# EAGLE board arm7-oscilloscope (EAGLE 4.16), part 1 of 2
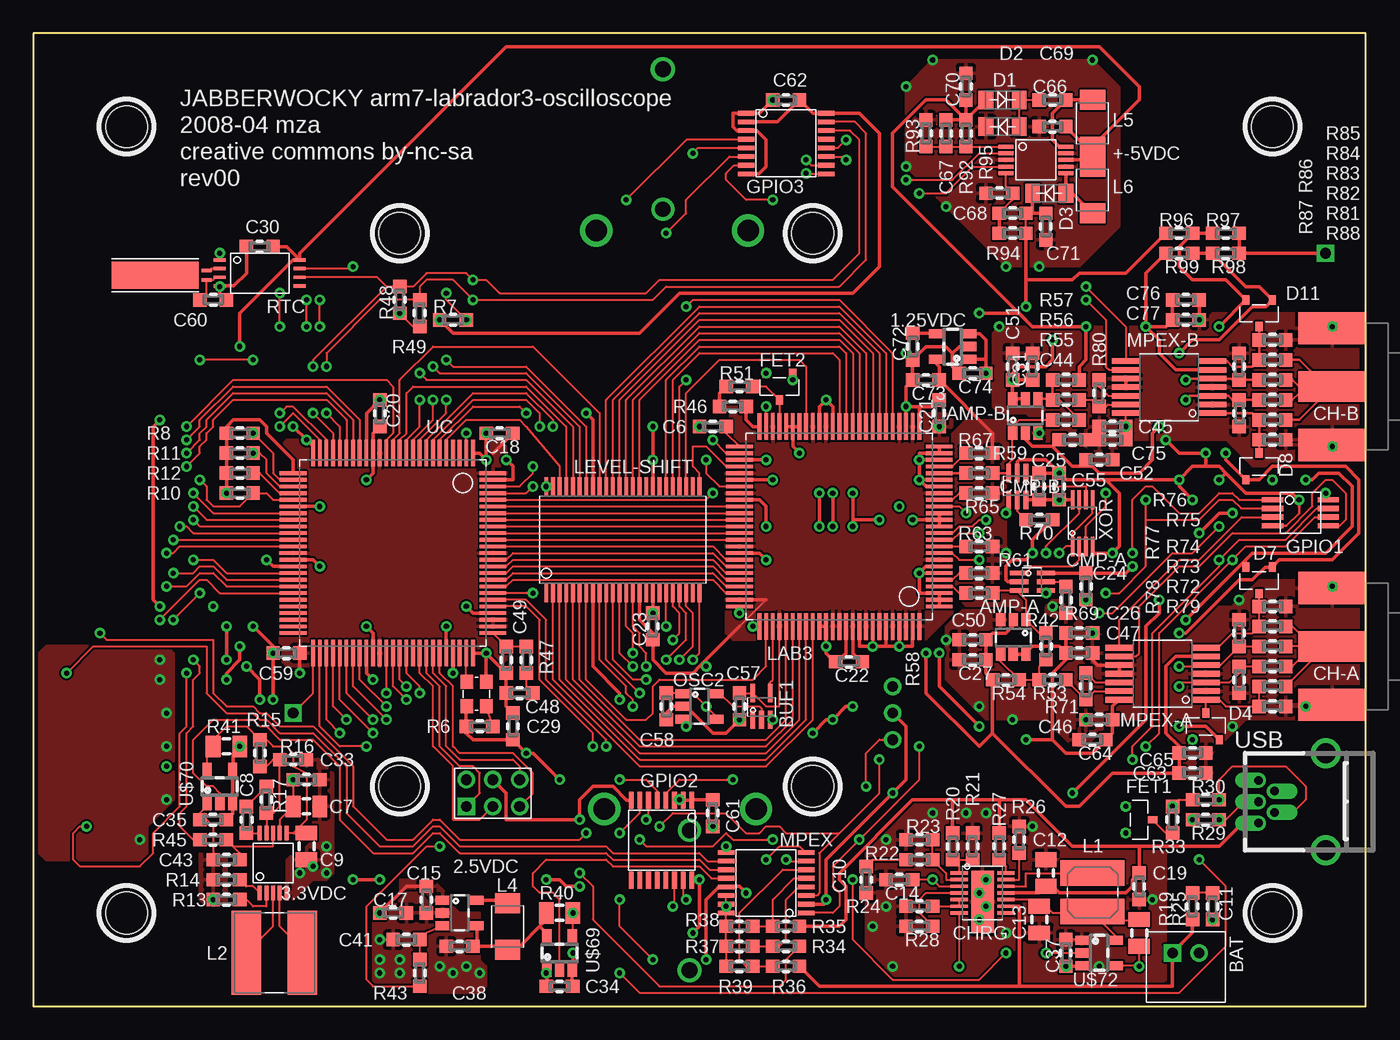
[diagram p0: board, top side]
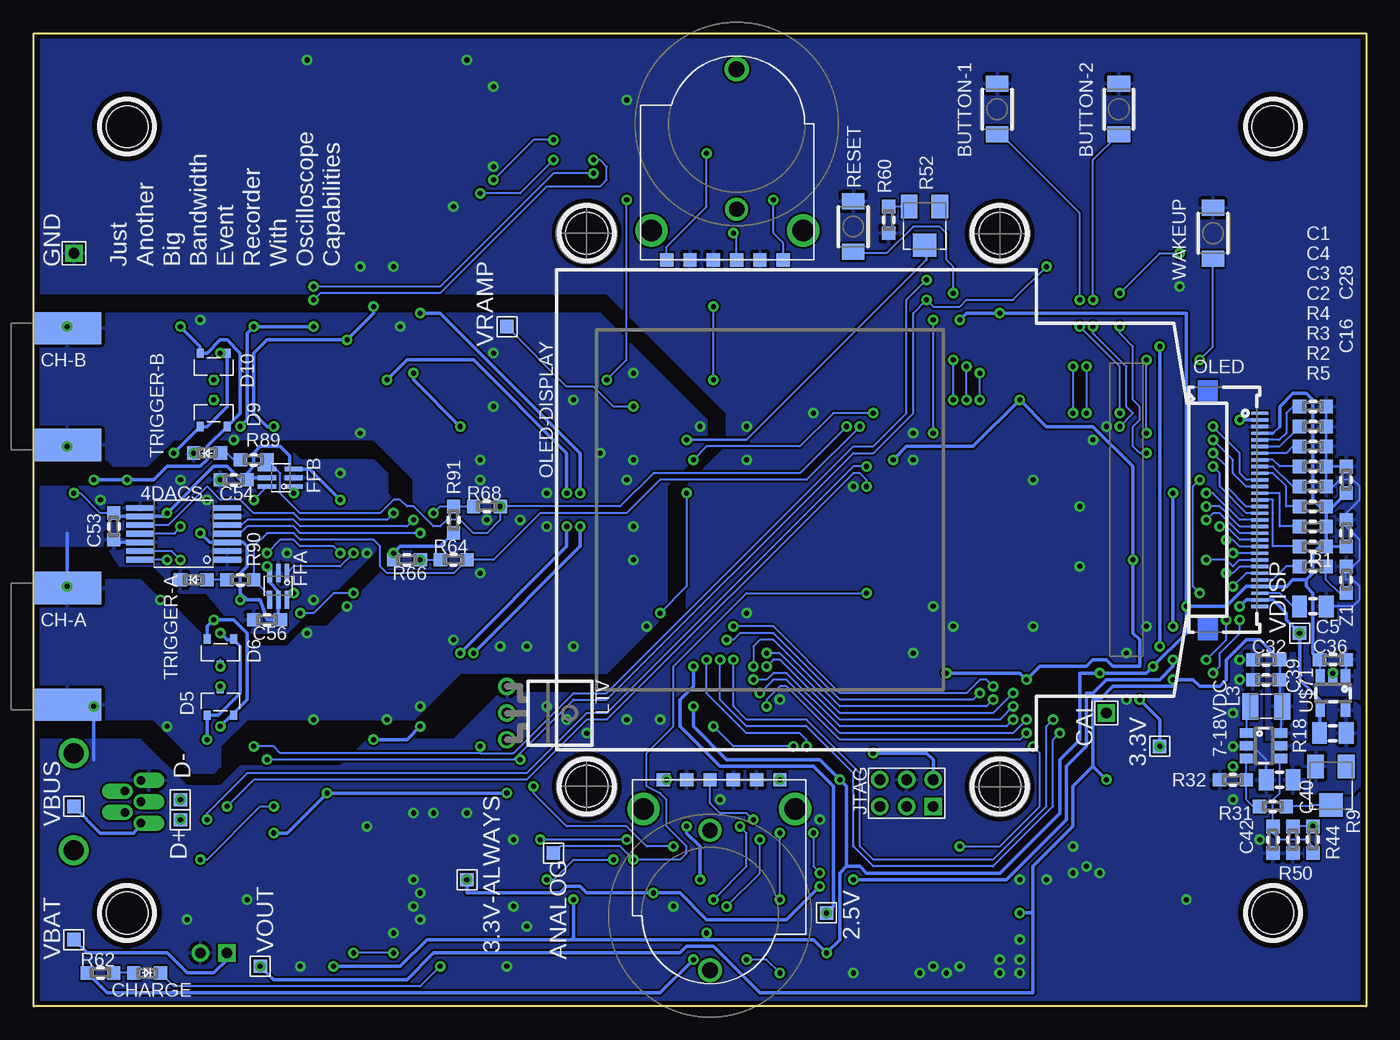
[diagram p1: board, bottom side, seen from below]

Size 100 x 73 mm. Coordinates in mm from the lower left corner, seen from the top.
Outline: 0,0 100,0 100,73 0,73 0,0
Copper layers (1*16): Top 0.035mm / dielectric 1.5mm / Bottom 0.035mm
Design rules "default": minimum track width 6mil, minimum drill 15mil, track to track 6mil, track to pad 6mil, pad to pad 6mil, via to via 6mil, smd to smd 0mil, copper to edge 0mil, drill to drill 8mil, minimum pad ring 10mil, minimum via ring 8mil, stop-mask expansion 4mil, vias tented up to drill 0mil, thermal gap 10mil

## Footprints (pad centres in the part's own frame; a part is rotated, then mirrored left to right if it is on the bottom)
SOT-23-5 = smd 0.69 x 0.99: 1 -0.953,-1.295; 2 0,-1.295; 3 0.953,-1.295; 4 0.953,1.291; 5 -0.953,1.291
TEST-POINT-SURFACE-MOUNT-1X1 = smd 1 x 1: 1 0,0
MSOP-10 = smd 0.295 x 1.1: 1 0,0; 2 0.5,0; 3 1,0; 4 1.5,0; 5 2,0; 6 2,4.5; 7 1.5,4.5; 8 1,4.5; 9 0.5,4.5; 10 0,4.5
TSSOP-14 = smd 0.42 x 2.1: 01 0,0; 02 0.65,0; 03 1.3,0; 04 1.95,0; 05 2.6,0; 06 3.25,0; 07 3.9,0; 08 3.9,6.5; 09 3.25,6.5; 10 2.6,6.5; 11 1.95,6.5; 12 1.3,6.5; 13 0.65,6.5; 14 0,6.5
SOT-23-6 = smd 0.69 x 0.99: 1 -0.003,0.006; 2 0.95,0.006; 3 1.903,0.006; 4 1.903,2.592; 5 0.953,2.592; 6 -0.003,2.592
S2B-PH-K = drill 0.8 square: 1 2,0 | drill 0.8 round: 2 0,0
SC-70-5 = smd 0.35 x 1.38: 1 0,0; 2 0.65,0; 3 1.3,0; 4 1.3,2; 5 0,2
B3U-1000P = smd 1.2 x 1.7: 1 -1.9,0; 2 1.9,0
0603 = smd 1 x 1: 1 2,0; 2 0,0
0805 = smd 1.1 x 1.6: 1 0,0; 2 2,0
TEST-POINT-THROUGH-HOLE = drill 0.8 square: 1 0,0
SMA-SHORT-BARREL-SD-73251-115 = smd 5.08 x 2.415: GND@1 0,-4.383; GND@2 0,4.383 | smd 5.08 x 2.415 bottom: GND@3 0,4.383; GND@4 0,-4.383 | smd 5.08 x 2.29: SIGNAL 0,0
0603' = smd 1 x 1: A 2,0; C 0,0
DFN-14 = smd 0.25 x 1.3: 01 0,0; 02 0.5,0; 03 1,0; 04 1.5,0; 05 2,0; 06 2.5,0; 07 3,0; 08 3,3.5; 09 2.5,3.5; 10 2,3.5; 11 1.5,3.5; 12 1,3.5; 13 0.5,3.5; 14 0,3.5 | smd 4.65 x 1.7: BOTTOM-PAD 2.15,1.75
SC-70-6 = smd 0.35 x 1.38: 1 0,0; 2 0.65,0; 3 1.3,0; 4 1.3,2; 5 0.65,2; 6 0,2
1005-DIODE-SCHOTTKY = smd 1.1 x 1.4: P$1 0,0; P$2 2.5,0
SOT-23 = smd 0.53 x 0.7: 04 2,0; 08 0,0; 12 1,2
MSOP-8-OR-TSSOP-8 = smd 0.4 x 1.6: 1 0,0; 2 0.65,0; 3 1.3,0; 4 1.95,0; 5 1.95,4.2; 6 1.3,4.2; 7 0.65,4.2; 8 0,4.2
TSSOP-16 = smd 0.35 x 1.25: 01 0,0; 02 0.65,0; 03 1.3,0; 04 1.95,0; 05 2.6,0; 06 3.25,0; 07 3.9,0; 08 4.55,0; 09 4.55,6; 10 3.9,6; 11 3.25,6; 12 2.6,6; 13 1.95,6; 14 1.3,6; 15 0.65,6; 16 0,6
HEADER-2MM-2X3 = drill 0.8 square: 1 0,0 | drill 0.8 round: 2 2,0; 3 4,0; 4 4,2; 5 2,2; 6 0,2
ELL4-M = smd 1.9 x 4.8: 1 0,0; 2 2.9,0
SD6030 = smd 6.3 x 2.2: 1 0,0; 2 0,4.2
1007 = smd 1.2 x 2: 1 -0.2,0; 2 2.2,0
1210 = smd 1.5 x 1.9: 1 0,0; 2 3.5,0
LQFP-100 = smd 0.28 x 2: 001 0,0; 002 0.5,0; 003 1,0; 004 1.5,0; 005 2,0; 006 2.5,0; 007 3,0; 008 3.5,0; 009 4,0; 010 4.5,0; 011 5,0; 012 5.5,0; 013 6,0; 014 6.5,0; 015 7,0; 016 7.5,0; 017 8,0; 018 8.5,0; 019 9,0; 020 9.5,0; 021 10,0; 022 10.5,0; 023 11,0; 024 11.5,0; 025 12,0; 051 12,15; 052 11.5,15; 053 11,15; 054 10.5,15; 055 10,15; 056 9.5,15; 057 9,15; 058 8.5,15; 059 8,15; 060 7.5,15; 061 7,15; 062 6.5,15; 063 6,15; 064 5.5,15; 065 5,15; 066 4.5,15; 067 4,15; 068 3.5,15; 069 3,15; 070 2.5,15; 071 2,15; 072 1.5,15; 073 1,15; 074 0.5,15; 075 0,15 | smd 2 x 0.28: 026 13.5,1.5; 027 13.5,2; 028 13.5,2.5; 029 13.5,3; 030 13.5,3.5; 031 13.5,4; 032 13.5,4.5; 033 13.5,5; 034 13.5,5.5; 035 13.5,6; 036 13.5,6.5; 037 13.5,7; 038 13.5,7.5; 039 13.5,8; 040 13.5,8.5; 041 13.5,9; 042 13.5,9.5; 043 13.5,10; 044 13.5,10.5; 045 13.5,11; 046 13.5,11.5; 047 13.5,12; 048 13.5,12.5; 049 13.5,13; 050 13.5,13.5; 076 -1.5,13.5; 077 -1.5,13; 078 -1.5,12.5; 079 -1.5,12; 080 -1.5,11.5; 081 -1.5,11; 082 -1.5,10.5; 083 -1.5,10; 084 -1.5,9.5; 085 -1.5,9; 086 -1.5,8.5; 087 -1.5,8; 088 -1.5,7.5; 089 -1.5,7; 090 -1.5,6.5; 091 -1.5,6; 092 -1.5,5.5; 093 -1.5,5; 094 -1.5,4.5; 095 -1.5,4; 096 -1.5,3.5; 097 -1.5,3; 098 -1.5,2.5; 099 -1.5,2; 100 -1.5,1.5
TSSOP-48 = smd 0.285 x 1.35: 01 0,0; 02 0.5,0; 03 1,0; 04 1.5,0; 05 2,0; 06 2.5,0; 07 3,0; 08 3.5,0; 09 4,0; 10 4.5,0; 11 5,0; 12 5.5,0; 13 6,0; 14 6.5,0; 15 7,0; 16 7.5,0; 17 8,0; 18 8.5,0; 19 9,0; 20 9.5,0; 21 10,0; 22 10.5,0; 23 11,0; 24 11.5,0; 25 11.5,8; 26 11,8; 27 10.5,8; 28 10,8; 29 9.5,8; 30 9,8; 31 8.5,8; 32 8,8; 33 7.5,8; 34 7,8; 35 6.5,8; 36 6,8; 37 5.5,8; 38 5,8; 39 4.5,8; 40 4,8; 41 3.5,8; 42 3,8; 43 2.5,8; 44 2,8; 45 1.5,8; 46 1,8; 47 0.5,8; 48 0,8
TSL250-BENT = drill 0.8 round: 1 -2,0; 2 0,0; 3 2,0
XF2M-3015-1A-TOP-CONTACTS-IN-USE = smd 0.25 x 1.3: 1 0.005,0.018; 2 0.505,0.018; 3 1.005,0.018; 4 1.505,0.018; 5 2.005,0.018; 6 2.505,0.018; 7 3.005,0.018; 8 3.505,0.018; 9 4.005,0.018; 10 4.505,0.018; 11 5.005,0.018; 12 5.505,0.018; 13 6.005,0.018; 14 6.505,0.018; 15 7.005,0.018; 16 7.505,0.018; 17 8.005,0.018; 18 8.505,0.018; 19 9.005,0.018; 20 9.505,0.018; 21 10.005,0.018; 22 10.505,0.018; 23 11.005,0.018; 24 11.505,0.018; 25 12.005,0.018; 26 12.505,0.018; 27 13.005,0.018; 28 13.505,0.018; 29 14.005,0.018; 30 14.505,0.018
OSCILLATOR-2.5X2.0 = smd 1.05 x 0.95: 1 0,0; 2 1.85,0; 3 1.85,1.45; 4 0,1.45
3313J-1 = smd 1.25 x 1.75: 1-CCW 2.3,0; 2-WIPER 0,0 | smd 1.75 x 1.75: 3-CW 1.15,2.9
EVQWK4 = smd 1 x 1: A 0,0; B 8.75,0; COM 1.75,0; SW1@3 3.5,0; SW1@5 7,0; SW2 5.25,0 | drill 1.21 round: P$1 5.25,14.3 | drill 1.61 round: P$2 -1.15,2.2; P$3 10.25,2.2 | drill 1.15 round: P$5 5.25,3.8
TSSOP-8 = smd 0.25 x 0.9: 1 0,0; 2 0.65,0; 3 1.3,0; 4 1.95,0; 5 1.95,6; 6 1.3,6; 7 0.65,6; 8 0,6
MOUNTING-HOLE-4-40-SHCS = hole 3.14: 0,0
CFS206 = smd 2 x 6.5: CASE 0.35,3.85 | smd 0.25 x 0.75: P$1 0,0; P$2 0.7,0
USB-MINI-B-THROUGH-HOLE = drill 0.65 offset: D+ 3.65,-5.05; D- 4.45,-3.85; GND 2.05,-5.05; ID 2.85,-3.85; VBUS 5.25,-5.05 | drill 1.5 round: SHIELD1 0,0; SHIELD2 7.3,0
VSSOP-8 = smd 0.285 x 1.45: 1 0,0; 2 0.5,0; 3 1,0; 4 1.5,0; 5 1.5,3.5; 6 1,3.5; 7 0.5,3.5; 8 0,3.5

## Placement (x,y rotation side)
1.25VDC  TPS731XX  [SOT-23-5]  69,49.5 90 top
2.5V  TEST-POINTSURFACE-MOUNT-1X1  [TEST-POINT-SURFACE-MOUNT-1X1]  40.5,7 90 bottom
2.5VDC  LM3670  [SOT-23-5]  32,7 270 top
3.3V  TEST-POINTSURFACE-MOUNT-1X1  [TEST-POINT-SURFACE-MOUNT-1X1]  15.5,19.5 90 bottom
3.3V-ALWAYS  TEST-POINTSURFACE-MOUNT-1X1  [TEST-POINT-SURFACE-MOUNT-1X1]  67.5,9.5 90 bottom
3.3VDC  LTC3440  [MSOP-10]  17,8.5 0 top
4DACS  AD56X5R  [TSSOP-14]  85.5,33.5 90 bottom
7-18VDC  LT3461  [SOT-23-6]  9,20.5 270 bottom
+-5VDC  LT1945  [MSOP-10]  73,64.5 270 top
AMP-A  OP-AMP-SOT-23-6  [SOT-23-6]  74.5,29 180 top
AMP-B  OP-AMP-SOT-23-6  [SOT-23-6]  73.5,43 0 top
ANALOG  TEST-POINTSURFACE-MOUNT-1X1  [TEST-POINT-SURFACE-MOUNT-1X1]  61,11.5 90 bottom
BAT  BATTERY-ON-EXTERNAL-CONNECTOR  [S2B-PH-K]  87.5,4 180 top
BUF1  SN74LVC1G34  [SC-70-5]  54,21.5 0 top
BUTTON-1  B3U-1000P  [B3U-1000P]  27.69,67.31 90 bottom
BUTTON-2  B3U-1000P  [B3U-1000P]  18.57,67.31 90 bottom
C1  1uF  [0603]  5,45 0 bottom
C2  1uF@~10V  [0603]  5,40.5 0 bottom
C3  1uF@~10V  [0603]  5,42 0 bottom
C4  1uF@~10V  [0603]  5,43.5 0 bottom
C5  4.7uF@~12V  [0805]  3,30 180 bottom
C6  1nF  [0603]  52,43.5 180 top
C7  10uF  [0805]  21.5,15 180 top
C8  1.5nF  [0603]  16,15 270 top
C9  22uF  [0805]  20.5,11 90 top
C10  0.1uF  [0603]  62.5,10.5 270 top
C11  4.7uF  [0603]  88.5,8.5 270 top
C12  10uF  [0805]  76,11 270 top
C13  10uF  [0805]  75.5,5.5 90 top
C14  1uF  [0603]  66,9.5 180 top
C15  4.7uF  [0603]  29.5,9 270 top
C16  1uF  [0603]  1.5,34.5 90 bottom
C17  0.1uF  [0603]  26,7 0 top
C18  0.1uF  [0603]  36,43 180 top
C19  0.1uF  [0603]  83,10 270 top
C20  0.1uF  [0603]  26,45.5 270 top
C21  0.1uF  [0603]  68,43.5 90 top
C22  0.1uF  [0603]  62.23,25.85 180 top
C23  0.1uF  [0603]  46.5,27.5 90 top
C24  0.1uF  [0603]  79,32.5 270 top
C25  0.1uF  [0603]  75.5,38 90 top
C26  0.1uF  [0603]  77.5,28 0 top
C27  0.1uF  [0603]  71.5,26 180 top
C28  0.1uF  [0603]  1.5,38.5 90 bottom
C29  0.1uF  [0603]  36,20 90 top
C30  0.1uF  [0603]  18,57 180 top
C31  0.1uF  [0603]  75,47 90 top
C32  0.1uF  [0603]  6.5,26 180 bottom
C33  0.1uF  [0603]  19.5,17 0 top
C34  0.1uF  [0603]  40.5,1.5 180 top
C35  0.1uF  [0603]  14.5,14 180 top
C36  0.1uF  [0603]  3.5,26 0 bottom
C37  0.1uF  [0603]  77.5,3 90 top
C38  10uF  [0603]  33,4.5 180 top
C39  1uF  [0603]  6.5,24.5 180 bottom
C40  2.2uF@~18V  [0805]  7.5,17 0 bottom
C41  0.1uF  [0603]  29,5 180 top
C42  0.1uF  [0603]  7,13.5 270 bottom
C43  0.1uF  [0603]  15.5,11 180 top
C44  0.1uF  [0603]  77,42.5 0 top
C45  0.1uF  [0603]  82,43.5 180 top
C46  0.1uF  [0603]  81,21.5 180 top
C47  4.7uF  [0603]  77.5,26.5 0 top
C48  10nF  [0603]  37.5,23.5 180 top
C49  2.2nF  [0603]  35.5,27 270 top
C50  4.7uF  [0603]  71.5,27.5 180 top
C51  4.7uF  [0603]  73.5,47 90 top
C52  4.7uF  [0603]  79,41 0 top
C53  0.1uF  [0603]  94,37 270 bottom
C54  0.1uF  [0603]  84,39.5 180 bottom
C55  0.1uF  [0603]  77,38 90 top
C56  0.1uF  [0603]  81.5,29 180 bottom
C57  0.1uF  [0603]  53,23.5 270 top
C58  0.1uF  [0603]  47.5,23.5 270 top
C59  0.1uF  [0603]  20,26.5 180 top
C60  6pF  [0603]  12.5,53 0 top
C61  0.1uF  [0603]  51,13.5 90 top
C62  0.1uF  [0603]  57.5,68 180 top
C63  0.1uF  [0603]  86,17.5 0 top
C64  4.7uF  [0603]  80.5,20 180 top
C65  4.7uF  [0603]  86,19 0 top
C66  0.1uF  [0603]  75.5,68 0 top
C67  100pF  [0603]  68.5,66.5 270 top
C68  4.7pF  [0603]  72.5,59.5 0 top
C69  4.7uF  [0603]  77.5,66 180 top
C70  4.7uF  [0603]  70,68 90 top
C71  4.7uF  [0603]  76,57.5 90 top
C72  1uF  [0603]  66,50.5 270 top
C73  1uF  [0603]  68,47 180 top
C74  10nF  [0603]  71.5,47.5 180 top
C75  4.7uF  [0603]  82,42.5 180 top
C76  0.1uF  [0603]  85.5,53 0 top
C77  4.7uF  [0603]  85.5,51.5 0 top
CAL  TEST-POINTTHROUGH-HOLE  [TEST-POINT-THROUGH-HOLE]  19.5,22 90 bottom
CH-A  SMA-SHORT-BARREL-SD-73251-115  [SMA-SHORT-BARREL-SD-73251-115]  97.5,27 180 top
CH-B  SMA-SHORT-BARREL-SD-73251-115  [SMA-SHORT-BARREL-SD-73251-115]  97.5,46.5 180 top
CHARGE  LED  [0603']  90.5,2.5 180 bottom
CHRG  LTC4088  [DFN-14]  69.5,10 270 top
CMP-A  ADCMP601  [SC-70-6]  74,32.5 270 top
CMP-B  ADCMP601  [SC-70-6]  74.5,40 180 top
D1  DIODE-SCHOTTKY1005  [1005-DIODE-SCHOTTKY]  71.5,68 0 top
D2  DIODE-SCHOTTKY1005  [1005-DIODE-SCHOTTKY]  74,66 180 top
D3  DIODE-SCHOTTKY1005  [1005-DIODE-SCHOTTKY]  77.5,61 180 top
D4  DIODE-SCHOTTKY-PAIR-ANODE-TO-CATHODE  [SOT-23]  87,20 0 top
D5  DIODE-SCHOTTKY-PAIR-ANODE-TO-CATHODE  [SOT-23]  87,21.83 0 bottom
D6  DIODE-SCHOTTKY-PAIR-ANODE-TO-CATHODE  [SOT-23]  85,27.56 180 bottom
D7  DIODE-SCHOTTKY-PAIR-ANODE-TO-CATHODE  [SOT-23]  93,32.95 180 top
D8  DIODE-SCHOTTKY-PAIR-ANODE-TO-CATHODE  [SOT-23]  91,39.5 0 top
D9  DIODE-SCHOTTKY-PAIR-ANODE-TO-CATHODE  [SOT-23]  87.5,43.5 0 bottom
D10  DIODE-SCHOTTKY-PAIR-ANODE-TO-CATHODE  [SOT-23]  85.5,49 180 bottom
D11  DIODE-SCHOTTKY-PAIR-ANODE-TO-CATHODE  [SOT-23]  93,53 180 top
D+  TEST-POINTSURFACE-MOUNT-1X1  [TEST-POINT-SURFACE-MOUNT-1X1]  89,14 270 bottom
D-  TEST-POINTSURFACE-MOUNT-1X1  [TEST-POINT-SURFACE-MOUNT-1X1]  89,15.5 270 bottom
FET1  NDS332P  [SOT-23]  82,15 270 top
FET2  NDS331N  [SOT-23]  57,47.5 180 top
FFA  74LVC1G175  [SC-70-6]  81,32.5 180 bottom
FFB  74LVC1G175  [SC-70-6]  80.5,39 90 bottom
GND  TEST-POINTTHROUGH-HOLE  [TEST-POINT-THROUGH-HOLE]  97,56.5 90 bottom
GPIO1  PCA9536  [MSOP-8-OR-TSSOP-8]  93,38 270 top
GPIO2  PCA9554  [TSSOP-16]  49.43,15.46 180 top
GPIO3  PCA9554  [TSSOP-16]  53.5,67 270 top
JTAG  HEADER-2MM-2X3-JTAG  [HEADER-2MM-2X3]  32.5,15 0 top
L1  3.3uH  [ELL4-M]  79.5,10 270 top
L2  22uH  [SD6030]  16,4 270 top
L3  22uH  [1007]  6.5,22.5 180 bottom
L4  10uH  [1210]  35.59,7.73 270 top
L5  10uH  [1210]  79.5,64.5 90 top
L6  10uH  [1210]  79.5,63 270 top
LAB3  LABRADOR3  [LQFP-100]  68,30 90 top
LEVEL-SHIFT  SN74CB3T16210  [TSSOP-48]  38.5,31 0 top
LTV  TLS250-BENT  [TSL250-BENT]  64.5,22 270 bottom
MPEX  ADG728  [TSSOP-16]  58,7 90 top
MPEX-A  FHP3194  [TSSOP-14]  88,23 90 top
MPEX-B  FHP3194  [TSSOP-14]  88.5,44.5 90 top
OLED  OLED-DISPLAY-CONNECTOR-2TOP-CONTACTS-IN-USE  [XF2M-3015-1A-TOP-CONTACTS-IN-USE]  8,44.5 270 bottom
OLED-DISPLAY  [OLED-DISPLAY-OUTLINE-UNFURLED]  8,44.5 90 bottom
OSC1  KC2520B-C2  [OSCILLATOR-2.5X2.0]  34,22.5 90 top
OSC2  LTC6905  [SOT-23-5]  50,22.5 270 top
R1  100k  [0603]  3,34.5 180 bottom
R2  100k  [0603]  3,36 180 bottom
R3  100k  [0603]  3,37.5 180 bottom
R4  1M  [0603]  5,39 0 bottom
R5  49.9  [0603]  5,33 0 bottom
R6  100k  [0603]  32.5,21 0 top
R7  100k  [0603]  30.5,51.5 0 top
R8  100k  [0603]  14.5,43 0 top
R9  50k  [3313J-1]  1.5,18 180 bottom
R10  100k  [0603]  14.5,38.5 0 top
R11  100k  [0603]  14.5,41.5 0 top
R12  100k  [0603]  14.5,40 0 top
R13  340k  [0603]  15.5,8 180 top
R14  200k  [0603]  15.5,9.5 180 top
R15  340k  [0603]  17,20 270 top
R16  200k  [0603]  18.5,18.5 0 top
R17  15k  [0603]  17.5,14.5 90 top
R18  1  [0805]  1.5,20.5 180 bottom
R19  0.1  [0805]  83,6.5 270 top
R20  100k  [0603]  69,13 270 top
R21  100k-thermistor  [0603]  70.5,11 90 top
R22  8.2  [0603]  65.5,11 0 top
R23  2.94k  [0603]  65.5,12.5 0 top
R24  499  [0603]  65.5,7.5 0 top
R25  1  [0603]  87,6.5 90 top
R26  10k  [0603]  74,11.5 90 top
R27  10k  [0603]  72.5,11 90 top
R28  10k  [0603]  67.5,6 180 top
R29  27  [0603]  89,14 180 top
R30  27  [0603]  89,15.5 180 top
R31  53.6k  [0603]  6,15 180 bottom
R32  10k  [0603]  9,17 180 bottom
R33  1.5k  [0603]  85.5,13 90 top
R34  1.47M  [0603]  57.5,4.5 180 top
R35  200k  [0603]  57.5,6 180 top
R36  100k  [0603]  57.5,3 180 top
R37  330k  [0603]  54,4.5 180 top
R38  330k  [0603]  54,6 180 top
R39  330k  [0603]  54,3 180 top
R40  0.1  [0805]  38.5,7 0 top
R41  0.1  [0805]  13.5,19.5 0 top
R42  523  [0603]  76,28 270 top
R43  10k  [0603]  29,3.5 270 top
R44  100k  [0603]  4,11.5 90 bottom
R45  20k  [0603]  14.5,12.5 180 top
R46  49.9k  [0603]  51.5,45 0 top
R47  100  [0603]  37,27 270 top
R48  4.7k  [0603]  27.5,52 90 top
R49  4.7k  [0603]  29,51 90 top
R50  10k  [0603]  5.5,13.5 270 bottom
R51  49.9k  [0603]  52,46.5 0 top
R52  50k  [3313J-1]  32,60 180 bottom
R53  523  [0603]  75.5,24.5 0 top
R54  2.1k  [0603]  74,24.5 180 top
R55  523  [0603]  76.5,44 0 top
R56  523  [0603]  76.5,45.5 0 top
R57  2.1k  [0603]  76.5,47 0 top
R58  1k  [0603]  70,31 0 top
R59  1k  [0603]  70,40 0 top
R60  10k  [0603]  35.85,60 270 bottom
R61  953  [0603]  72,32.5 180 top
R62  750  [0603]  96,2.5 0 bottom
R63  953  [0603]  72,34.5 180 top
R64  20k  [0603]  69.5,33.5 0 bottom
R65  953  [0603]  72,38.5 180 top
R66  10k  [0603]  71,33.5 180 bottom
R67  953  [0603]  72,41.5 180 top
R68  20k  [0603]  67,37.5 0 bottom
R69  100k  [0603]  77.5,31.5 270 top
R70  100k  [0603]  74.5,36.5 0 top
R71  1.5k  [0603]  79,23 90 top
R72  3.92M  [0603]  92,24 0 top
R73  3.83M  [0603]  92,25.5 0 top
R74  3.65M  [0603]  92,27 0 top
R75  2.55M  [0603]  92,28.5 0 top
R76  1.5M  [0603]  92,30 0 top
R77  374k  [0603]  90.5,27 90 top
R78  187k  [0603]  90.5,25.5 270 top
R79  46.4k  [0603]  92,22.5 0 top
R80  1.5k  [0603]  80,45 90 top
R81  3.92M  [0603]  92,44 0 top
R82  3.83M  [0603]  92,45.5 0 top
R83  3.65M  [0603]  92,47 0 top
R84  2.55M  [0603]  92,48.5 0 top
R85  1.5M  [0603]  92,50 0 top
R86  374k  [0603]  90.5,47 90 top
R87  187k  [0603]  90.5,45.5 270 top
R88  46.4k  [0603]  92,42.5 0 top
R89  750  [0603]  82.5,41 180 bottom
R90  750  [0603]  83.5,32 180 bottom
R91  10k  [0603]  68.5,37.5 270 bottom
R92  30.1k  [0603]  70,66.5 270 top
R93  10k  [0603]  67,64.5 90 top
R94  30.9k  [0603]  72.5,58 0 top
R95  10k  [0603]  71.5,61 0 top
R96  4.22k  [0603]  85,58 0 top
R97  750  [0603]  88.5,58 0 top
R98  750  [0603]  90.5,56.5 180 top
R99  4.22k  [0603]  87,56.5 180 top
RESET  B3U-1000P  [B3U-1000P]  38.5,58.5 270 bottom
ROT1  EVQWK4  [EVQWK4]  44,17 180 bottom
ROT2  EVQWK4  [EVQWK4]  52.5,56 0 bottom
RTC  S-35390A  [TSSOP-8]  14,56 270 top
TRIGGER-A  LED  [0603']  89,32 0 bottom
TRIGGER-B  LED  [0603']  88,41.5 0 bottom
U$6  [MOUNTING-HOLE-4-40-SHCS]  7,7 0 bottom
U$37  [MOUNTING-HOLE-4-40-SHCS]  7,66 0 bottom
U$41  CFS206  [CFS206]  13,54.5 90 top
U$59  [MOUNTING-HOLE-4-40-SHCS]  93,66 0 bottom
U$69  MAX4372  [SOT-23-5]  39.5,4 0 top
U$70  MAX4372  [SOT-23-5]  14,16.5 0 top
U$71  MAX4372  [SOT-23-5]  2.5,23.5 180 bottom
U$72  MAX4372  [SOT-23-5]  80,4 270 top
U$77  [MOUNTING-HOLE-4-40-SHCS]  93,7 0 bottom
U$176  [MOUNTING-HOLE-4-40-SHCS]  58.5,58 0 bottom
U$177  [MOUNTING-HOLE-4-40-SHCS]  27.5,16.5 0 bottom
U$178  [MOUNTING-HOLE-4-40-SHCS]  27.5,58 0 bottom
U$179  [MOUNTING-HOLE-4-40-SHCS]  58.5,16.5 0 bottom
UC  AT91SAM7A3  [LQFP-100]  33,41.5 180 top
USB  USB-MINI-B  [USB-MINI-B-THROUGH-HOLE]  97,19 270 top
VBAT  TEST-POINTSURFACE-MOUNT-1X1  [TEST-POINT-SURFACE-MOUNT-1X1]  97,5 90 bottom
VBUS  TEST-POINTSURFACE-MOUNT-1X1  [TEST-POINT-SURFACE-MOUNT-1X1]  97,15 90 bottom
VDISP  TEST-POINTSURFACE-MOUNT-1X1  [TEST-POINT-SURFACE-MOUNT-1X1]  5,28 90 bottom
VOUT  TEST-POINTSURFACE-MOUNT-1X1  [TEST-POINT-SURFACE-MOUNT-1X1]  83,3 90 bottom
VRAMP  TEST-POINTSURFACE-MOUNT-1X1  [TEST-POINT-SURFACE-MOUNT-1X1]  64.5,51 90 bottom
WAKEUP  B3U-1000P  [B3U-1000P]  11.5,58 270 bottom
XOR  74LVC2G86  [VSSOP-8]  78,34.5 0 top
Z1  3.6V  [0603]  1.5,31 90 bottom

## Library data of the parts
1.25VDC = mza-texas-instruments-voltage-regulators
2.5V 3.3V 3.3V-ALWAYS ANALOG CAL D+ D- GND VBAT VBUS VDISP VOUT VRAMP = mza-test-points
2.5VDC = mza-national-semiconductor-voltage-regulators
3.3VDC 7-18VDC +-5VDC CHRG = mza-linear-technology-voltage-regulators
4DACS = mza-analog-devices-dacs
AMP-A AMP-B = mza-operational-amplifiers
BAT = mza-jst-through-hole-connectors
BUF1 FFA FFB XOR = mza-texas-instruments-logic
BUTTON-1 BUTTON-2 C1-C77 D1-D3 R1-R8 R10-R51 R53-R99 RESET WAKEUP Z1 = mza-discrete-components-surface-mount
CH-A CH-B USB = mza-molex-connectors
CHARGE TRIGGER-A TRIGGER-B = mza-osram-leds
CMP-A CMP-B = mza-analog-devices-comparators
D4-D11 = mza-diodes
FET1 FET2 = mza-fairchild-fets
GPIO1-GPIO3 = mza-nxp-i2c-gpio-extenders
JTAG = mza-through-hole-connectors
L1 = mza-panasonic-inductors
L2 = mza-coiltronics-inductors
L3 = mza-taiyo-yuden-inductors
L4-L6 = mza-tdk-inductors
LAB3 = mza-UH-IDL
LEVEL-SHIFT = mza-texas-instruments-voltage-level-translators
LTV = mza-discrete-components-through-hole
MPEX = mza-analog-devices-multiplexers
MPEX-A MPEX-B = mza-fairchild-multiplexers
OLED = mza-omron-connectors
OLED-DISPLAY = mza-univision-oled-displays
OSC1 = mza-kyocera-oscillators
OSC2 = mza-linear-oscillators
R9 R52 = mza-bourns-potentiometers
ROT1 ROT2 = mza-panasonic-rotary-encoders
RTC = mza-seiko-rtcs
U$6 U$37 U$59 U$77 U$176-U$179 = mza-screw-holes
U$41 = mza-citizen-crystals
U$69-U$72 = mza-maxim-amplifiers
UC = mza-atmel-microcontrollers

## Nets
0.75V: D4.04 D5.04 D6.04 D7.04 D8.04 D9.04 D10.04 D11.04 R96.1 R97.2
1.8V: C20.2 UC.017 UC.040 UC.059 UC.072 UC.099
1.25V: 1.25VDC.5 C73.2 R61.2 R63.2 R65.2 R66.1 R67.2 R91.1
2.5V: 1.25VDC.1 1.25VDC.3 2.5V.1 BUF1.5 C21.2 C22.2 C23.2 C57.2 C74.2 LAB3.008 LAB3.018 LAB3.027 LAB3.029 LAB3.040 LAB3.042 LAB3.048 LAB3.055 LAB3.058 LAB3.066 LAB3.074 LAB3.079 LAB3.087 LAB3.088 LAB3.090 LAB3.092 LAB3.094 LAB3.096 LAB3.098 LAB3.100 LEVEL-SHIFT.15 R40.2 R46.2 R51.2 U$69.4
2.5V-CURRENT: MPEX.12 U$69.2
2.5V-ENABLE: R43.1 UC.052
3.3V: 3.3V.1 4DACS.03 4DACS.09 C16.2 C18.2 C24.2 C25.2 C28.2 C29.2 C34.2 C35.2 C36.2 C37.2 C53.2 C54.2 C55.2 C56.2 C58.2 C59.2 C61.2 C62.2 CMP-A.6 CMP-B.6 FET1.04 FFA.3 FFA.5 FFB.3 FFB.5 GPIO1.8 GPIO2.16 GPIO3.02 GPIO3.16 JTAG.6 LTV.2 MPEX.02 OLED.4 OLED.27 OSC1.4 OSC2.1 OSC2.4 R1.2 R2.2 R3.2 R6.2 R7.2 R41.2 R48.2 R49.2 U$69.3 U$70.3 U$70.4 U$71.3 U$72.3 UC.015 UC.038 UC.061 UC.077 UC.078 UC.088 UC.100 XOR.8
3.3V-ALWAYS: 3.3V-ALWAYS.1 C14.2 CHRG.03 MPEX.13 R8.2 R10.2 R11.2 R12.2 R62.2 UC.026
3.3V-CURRENT: MPEX.11 U$70.2
5V: AMP-A.5 AMP-A.6 AMP-B.5 AMP-B.6 C26.2 C31.2 C45.2 C46.2 C47.2 C51.2 C64.2 C68.1 C71.1 C75.2 D3.P$2 MPEX-A.14 MPEX-B.14 R94.1 R96.2
+V: 2.5VDC.1 3.3VDC.7 7-18VDC.6 +-5VDC.8 C7.2 C15.2 C17.2 C30.2 C32.2 C33.2 C39.2 C69.2 L3.1 L5.1 L6.1 R19.2 RTC.8 U$72.4 VOUT.1
-0.75V: D4.08 D5.08 D6.08 D7.08 D8.08 D9.08 D10.08 D11.08 R98.1 R99.2
-5V: AMP-A.2 AMP-B.2 C27.2 C44.2 C50.2 C52.2 C63.2 C65.2 C67.2 C70.2 C76.2 C77.2 D1.P$1 MPEX-A.06 MPEX-B.06 R54.1 R57.1 R92.2 R99.1
AMBIENT-LIGHT: LTV.3 MPEX.09
ANALOG: ANALOG.1 MPEX.08 UC.082
BUTTON1: BUTTON-1.1 UC.023
BUTTON2: BUTTON-2.1 UC.024
CA00-2.5: LAB3.083 LEVEL-SHIFT.03
CA00-3.3: LEVEL-SHIFT.45 UC.012
CA01-2.5: LAB3.082 LEVEL-SHIFT.04
CA01-3.3: LEVEL-SHIFT.44 UC.011
CA02-2.5: LAB3.081 LEVEL-SHIFT.05
CA02-3.3: LEVEL-SHIFT.43 UC.010
CA03-2.5: LAB3.080 LEVEL-SHIFT.06
CA03-3.3: LEVEL-SHIFT.42 UC.009
CAL: CAL.1 UC.051
CHANNEL-A: LAB3.004 R58.2
CHANNEL-A-MULTIPLEXER-A0: GPIO1.3 MPEX-A.08
CHANNEL-A-MULTIPLEXER-A1: GPIO1.5 MPEX-A.09
CHANNEL-A-RAW: AMP-A.1 CMP-A.3 R42.2 R58.1
CHANNEL-B: LAB3.021 R59.2
CHANNEL-B-MULTIPLEXER-A0: GPIO3.09 MPEX-B.08
CHANNEL-B-MULTIPLEXER-A1: GPIO3.10 MPEX-B.09
CHANNEL-B-RAW: AMP-B.1 CMP-B.3 R55.2 R59.1
CHRG: CHARGE.C CHRG.07
CMPBIAS-SHORT: FET2.08 GPIO3.07
D/C#: OLED.11 UC.014
DISPLAY_VOLTAGE_ENABLE: R44.1 R50.2 UC.044
GCCLEAR-2.5: LAB3.077 LEVEL-SHIFT.07
GCCLEAR-3.3: LEVEL-SHIFT.40 UC.013
GCCLOCK-2.5: BUF1.4 LAB3.078
GCCLOCK-GATE: OSC2.3 UC.081
GND: 1.25VDC.2 2.5VDC.2 3.3VDC.5 4DACS.01 4DACS.02 4DACS.06 4DACS.08 4DACS.12 7-18VDC.2 +-5VDC.3 +-5VDC.7 +-5VDC.9 AMP-A.3 AMP-B.3 BAT.2 BUF1.3 BUTTON-1.2 BUTTON-2.2 C1.1 C2.1 C3.1 C4.1 C5.1 C6.1 C7.1 C9.1 C10.1 C11.1 C12.1 C13.1 C14.1 C15.1 C16.1 C17.1 C18.1 C19.1 C20.1 C21.1 C22.1 C23.1 C24.1 C25.1 C26.1 C27.1 C28.1 C29.1 C30.1 C31.1 C32.1 C33.1 C34.1 C35.1 C36.1 C37.1 C38.1 C39.1 C40.1 C41.1 C42.1 C43.1 C44.1 C45.1 C46.1 C47.1 C48.1 C49.1 C50.1 C51.1 C52.1 C53.1 C54.1 C55.1 C56.1 C57.1 C58.1 C59.1 C60.1 C61.1 C62.1 C63.1 C64.1 C65.1 C69.1 C70.1 C71.2 C72.1 C73.1 C74.1 C75.1 C76.1 C77.1 CH-A.GND@1 CH-A.GND@2 CH-A.GND@3 CH-A.GND@4 CH-B.GND@1 CH-B.GND@2 CH-B.GND@3 CH-B.GND@4 CHRG.BOTTOM-PAD CMP-A.2 CMP-B.2 D2.P$2 FET2.04 FFA.2 FFB.2 GND.1 GPIO1.4 GPIO2.01 GPIO2.02 GPIO2.03 GPIO2.08 GPIO3.01 GPIO3.03 GPIO3.08 JTAG.5 LAB3.001 LAB3.002 LAB3.003 LAB3.006 LAB3.007 LAB3.013 LAB3.014 LAB3.015 LAB3.019 LAB3.020 LAB3.023 LAB3.024 LAB3.025 LAB3.026 LAB3.028 LAB3.039 LAB3.041 LAB3.044 LAB3.045 LAB3.046 LAB3.053 LAB3.056 LAB3.059 LAB3.067 LAB3.076 LAB3.085 LAB3.086 LAB3.089 LAB3.091 LAB3.093 LAB3.095 LAB3.097 LAB3.099 LEVEL-SHIFT.08 LEVEL-SHIFT.17 LEVEL-SHIFT.32 LEVEL-SHIFT.41 LEVEL-SHIFT.47 LEVEL-SHIFT.48 LTV.1 MPEX-A.02 MPEX-A.04 MPEX-A.10 MPEX-A.11 MPEX-B.02 MPEX-B.04 MPEX-B.10 MPEX-B.11 MPEX.14 MPEX.15 MPEX.16 OLED.3 OSC1.2 OSC2.2 R4.1 R13.1 R14.1 R16.1 R21.1 R23.2 R24.2 R26.1 R28.1 R32.1 R37.1 R38.1 R39.1 R50.1 R60.1 R69.1 R70.1 R76.1 R77.1 R78.1 R79.1 R85.1 R86.1 R87.1 R88.1 R93.1 R95.2 R97.1 R98.2 RESET.1 ROT1.COM ROT1.SW1@3 ROT1.SW1@5 ROT2.COM ROT2.SW1@3 ROT2.SW1@5 RTC.4 TRIGGER-A.C TRIGGER-B.C U$69.1 U$70.1 U$71.1 U$72.1 UC.001 UC.016 UC.025 UC.031 UC.039 UC.060 UC.071 UC.075 UC.079 USB.GND WAKEUP.1 XOR.4 Z1.1
HITBUS-2.5: LAB3.075 UC.096
LAB3-DATA0: LAB3.073 UC.083
LAB3-DATA1: LAB3.072 UC.084
LAB3-DATA2: LAB3.071 UC.085
LAB3-DATA3: LAB3.070 UC.086
LAB3-DATA4: LAB3.069 UC.087
LAB3-DATA5: LAB3.068 UC.089
LAB3-DATA6: LAB3.065 UC.090
LAB3-DATA7: LAB3.064 UC.091
LAB3-DATA8: LAB3.063 UC.092
LAB3-DATA9: LAB3.062 UC.093
LAB3-DATA10: LAB3.061 UC.094
LAB3-DATA11: LAB3.060 UC.095
LTC4088-D0: CHRG.13 R26.2
LTC4088-D1: CHRG.14 R27.2
LTC4088-D2: CHRG.04 R28.2
MAIN_OSCILLATOR: OSC1.3 UC.074
N$1: R7.1 RESET.2 UC.002
N$2: R8.1 UC.027 WAKEUP.2
N$3: +-5VDC.1 C67.1 R92.1 R93.2
N$4: 4DACS.11 CMP-A.4
N$5: R52.1-CCW R60.2
N$7: CHARGE.A R62.1
N$8: BUF1.2 OSC2.5
N$9: OLED.14 R1.1
N$12: 1.25VDC.4 C72.2
N$13: LAB3.016 R68.2 R91.2
N$14: LAB3.009 R64.2 R66.2
N$15: GPIO2.04 ROT1.B
N$16: GPIO2.05 ROT1.A
N$17: GPIO2.06 ROT1.SW2
N$18: +-5VDC.5 C68.2 R94.2 R95.1
N$19: GPIO3.06 ROT2.SW2
N$20: GPIO3.04 ROT2.B
N$21: GPIO3.05 ROT2.A
N$22: +-5VDC.6 D3.P$1 L6.2
N$26: 3.3VDC.2 R13.2
N$27: 3.3VDC.3 L2.1
N$28: 3.3VDC.1 R14.2
N$29: 3.3VDC.4 L2.2
N$30: C8.2 R17.1
N$31: OLED.13 R2.1
N$32: OLED.10 R3.1
N$33: +-5VDC.10 C66.1 L5.2
N$34: C1.2 OLED.5
N$35: C2.2 OLED.8
N$36: C3.2 OLED.7
N$37: C4.2 OLED.6
N$38: OLED.9 R4.2
N$39: C5.2 OLED.28
N$40: OLED.26 R5.2
N$41: R5.1 Z1.2
N$42: C66.2 D1.P$2 D2.P$1
N$45: 3.3VDC.10 C8.1
N$46: OSC1.1 R6.1
N$48: FET1.12 R33.2
N$49: LAB3.052 R52.3-CW
N$50: 3.3VDC.9 R15.1 R16.2 R17.2
N$51: 2.5VDC.4 C38.2 L4.2 R40.1 U$69.5
N$52: C60.2 RTC.3 U$41.P$1
N$53: RTC.2 U$41.P$2
N$54: 7-18VDC.1 L3.2
N$55: LAB3.050 R46.1
N$56: 7-18VDC.3 R31.1 R32.2
N$57: FET2.12 LAB3.047 R51.1
N$58: C6.2 LAB3.051
N$59: 4DACS.04 LAB3.011
N$61: CHRG.01 R20.1 R21.2
N$62: CHRG.12 L1.1
N$63: 4DACS.05 LAB3.012
N$65: C10.2 R22.2
N$66: CHRG.02 R22.1 R23.1
N$67: CHRG.05 CHRG.06 R24.1
N$68: C49.2 R47.2 UC.076
N$69: C11.2 R25.1
N$70: CMP-A.1 XOR.2
N$71: C48.2 R47.1
N$72: D+.1 R29.2 USB.D+
N$73: D-.1 R30.2 USB.D-
N$74: R29.1 UC.098
N$75: R30.1 R33.1 UC.097
N$76: JTAG.1 UC.068
N$77: JTAG.2 UC.067
N$79: JTAG.3 UC.070
N$80: 3.3VDC.6 C9.2 R15.2 R41.1 U$70.5
N$81: JTAG.4 UC.069
N$82: 2.5VDC.3 C41.2 R43.2
N$83: R9.3-CW R31.2
N$84: 7-18VDC.4 C42.2 R44.2
N$85: 3.3VDC.8 C43.2 R45.2
N$88: FFA.1 XOR.7
N$89: FFB.1 XOR.3
N$90: CMP-B.1 XOR.6
N$92: AMP-A.4 R42.1 R53.2 R54.2
N$94: AMP-B.4 R55.1 R56.2 R57.2
N$96: 4DACS.10 CMP-B.4
N$97: LAB3.005 R61.1
N$99: LAB3.010 R63.1
N$101: LAB3.017 R65.1
N$103: LAB3.022 R67.1
N$105: CMP-A.5 R69.2
N$106: CMP-B.5 R70.2
N$109: MPEX-A.13 R53.1 R71.2
N$110: MPEX-A.12 R71.1
N$111: D4.12 MPEX-A.01 R72.2 R79.2
N$113: D6.12 MPEX-A.05 R74.2 R77.2
N$114: D7.12 MPEX-A.07 R75.2 R76.2
N$116: MPEX-B.13 R56.1 R80.2
N$117: MPEX-B.12 R80.1
N$118: D8.12 MPEX-B.01 R81.2 R88.2
N$119: D9.12 MPEX-B.03 R82.2 R87.2
N$120: D10.12 MPEX-B.05 R83.2 R86.2
N$121: D11.12 MPEX-B.07 R84.2 R85.2
N$125: R90.1 TRIGGER-A.A
N$126: 2.5VDC.5 L4.1
N$127: R89.1 TRIGGER-B.A
N$1234: D5.12 MPEX-A.03 R73.2 R78.2
NRUN-2.5: LAB3.084 LEVEL-SHIFT.02
NRUN-3.3: LEVEL-SHIFT.46 UC.005
OLED-DATA0: OLED.17 UC.032
OLED-DATA1: OLED.18 UC.033
OLED-DATA2: OLED.19 UC.034
OLED-DATA3: OLED.20 UC.035
OLED-DATA4: OLED.21 UC.036
OLED-DATA5: OLED.22 UC.037
OLED-DATA6: OLED.23 UC.041
OLED-DATA7: OLED.24 UC.042
OLED-DATA8: OLED.25 UC.043
OLED_CS#: OLED.12 UC.018
POLARITY-SELECT: GPIO1.1 XOR.1 XOR.5
RAMP-2.5: LAB3.054 LEVEL-SHIFT.25
RAMP-3.3: LEVEL-SHIFT.24 UC.080
RCO-2.5: LAB3.057 UC.006
RD#: OLED.16 UC.020
SA00-2.5: LAB3.031 LEVEL-SHIFT.39
SA00-3.3: LEVEL-SHIFT.09 UC.055
SA01-2.5: LAB3.032 LEVEL-SHIFT.38
SA01-3.3: LEVEL-SHIFT.10 UC.056
SA02-2.5: LAB3.033 LEVEL-SHIFT.37
SA02-3.3: LEVEL-SHIFT.11 UC.057
SA03-2.5: LAB3.034 LEVEL-SHIFT.36
SA03-3.3: LEVEL-SHIFT.12 UC.058
SA04-2.5: LAB3.035 LEVEL-SHIFT.35
SA04-3.3: LEVEL-SHIFT.13 UC.062
SA05-2.5: LAB3.036 LEVEL-SHIFT.34
SA05-3.3: LEVEL-SHIFT.14 UC.063
SA06-2.5: LAB3.037 LEVEL-SHIFT.30
SA06-3.3: LEVEL-SHIFT.19 UC.064
SA07-2.5: LAB3.038 LEVEL-SHIFT.29
SA07-3.3: LEVEL-SHIFT.20 UC.065
SELMAIN-2.5: LAB3.030 LEVEL-SHIFT.28
SELMAIN-3.3: LEVEL-SHIFT.21 UC.054
SELTAIL-2.5: LAB3.043 LEVEL-SHIFT.27
SELTAIL-3.3: LEVEL-SHIFT.22 UC.053
SHUTDOWN#: R10.1 R45.1 UC.030
SHUTDOWN#-MINUS-5V: +-5VDC.2 GPIO3.12
SHUTDOWN#-PLUS-5V: +-5VDC.4 GPIO3.11
TRIGGER-A: FFA.4 R64.1 R90.2 UC.007
TRIGGER-B: FFB.4 R68.1 R89.2 UC.008
TRIGGER-CLEAR: FFA.6 FFB.6 GPIO1.2
TWCK: 4DACS.14 GPIO1.6 GPIO2.14 GPIO3.14 MPEX.01 R48.1 RTC.6 UC.022
TWD: 4DACS.13 GPIO1.7 GPIO2.15 GPIO3.15 MPEX.03 R49.1 RTC.7 UC.021
USB-PULLUP#: FET1.08 GPIO2.07
VBAT: C13.2 CHRG.10 L1.2 R19.1 U$72.5
VBATTERY: BAT.1 CHRG.09 R25.2 R36.2 VBAT.1
VBATTERY-DIVIDED: MPEX.06 R36.1 R39.2
VBUS: C12.2 C19.2 CHRG.11 R20.2 R27.1 R35.2 USB.VBUS VBUS.1
VBUS-DIVIDED: MPEX.05 R35.1 R38.2
VDISPLAY: OLED.2 OLED.29 R18.2 R34.2 U$71.4 VDISP.1
VDISPLAY-CURRENT: MPEX.10 U$71.2
VDISPLAY-DIVIDED: MPEX.04 R34.1 R37.2
VDISPLAY-PRIME: 7-18VDC.5 C40.2 R9.1-CCW R18.1 U$71.5
VIN-CHANNEL-A: CH-A.SIGNAL R72.1 R73.1 R74.1 R75.1
VIN-CHANNEL-B: CH-B.SIGNAL R81.1 R82.1 R83.1 R84.1
VOUT-CURRENT: MPEX.07 U$72.2
VRAMPMON: LAB3.049 VRAMP.1
VREF: 4DACS.07
WKUP0: R11.1 RTC.1 UC.028
WKUP1: R12.1 UC.029
WR#: OLED.15 UC.019